# Altium PCB WIFIOTG.PcbDoc
Units mm, origin at the board's own origin, x right, y up, seen from the top; angles counter-clockwise.
Board outline 18.86 x 30.91 mm, 2 copper layers (Top Layer, Bottom Layer); 12 components, 8 nets, 74 pads, 11 vias.
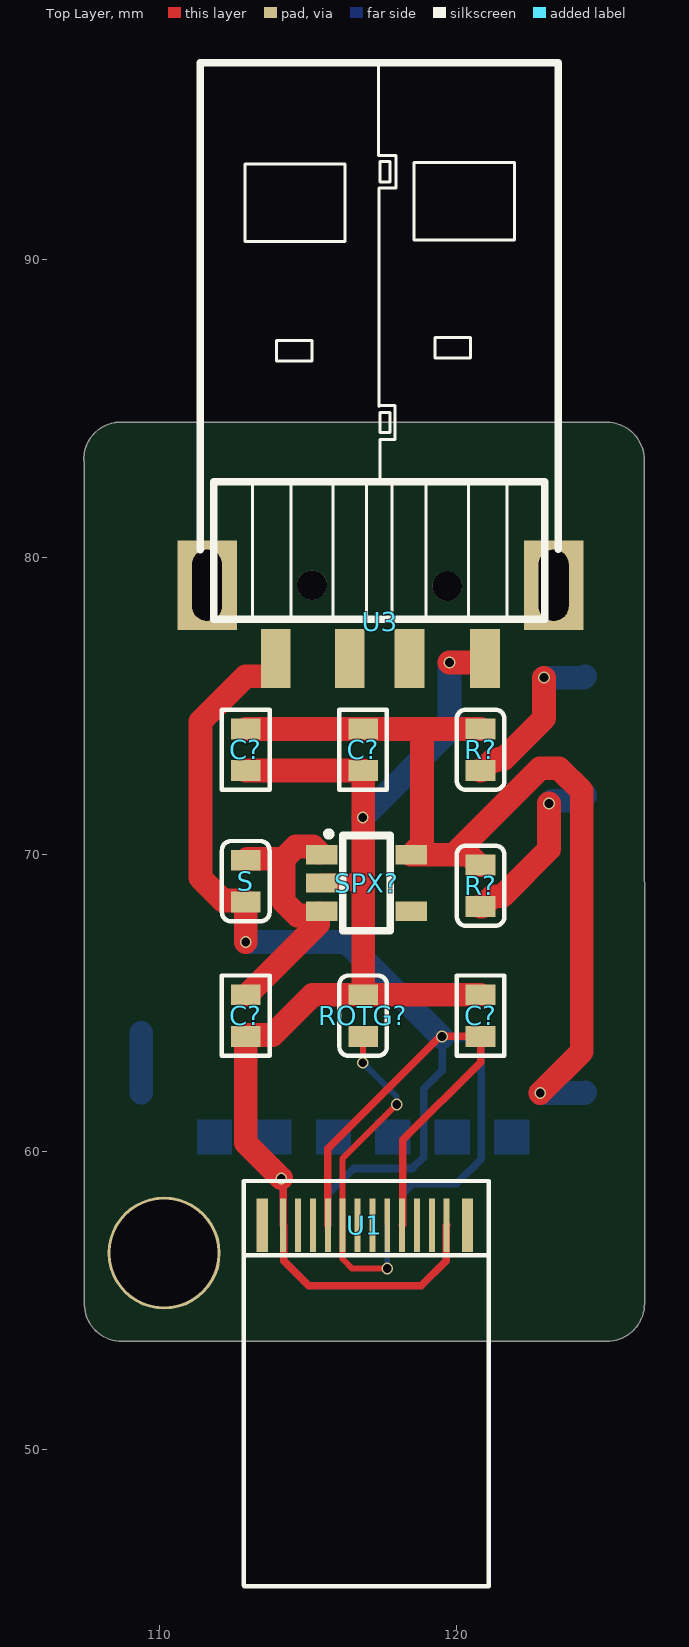
[diagram p0: Top Layer view]
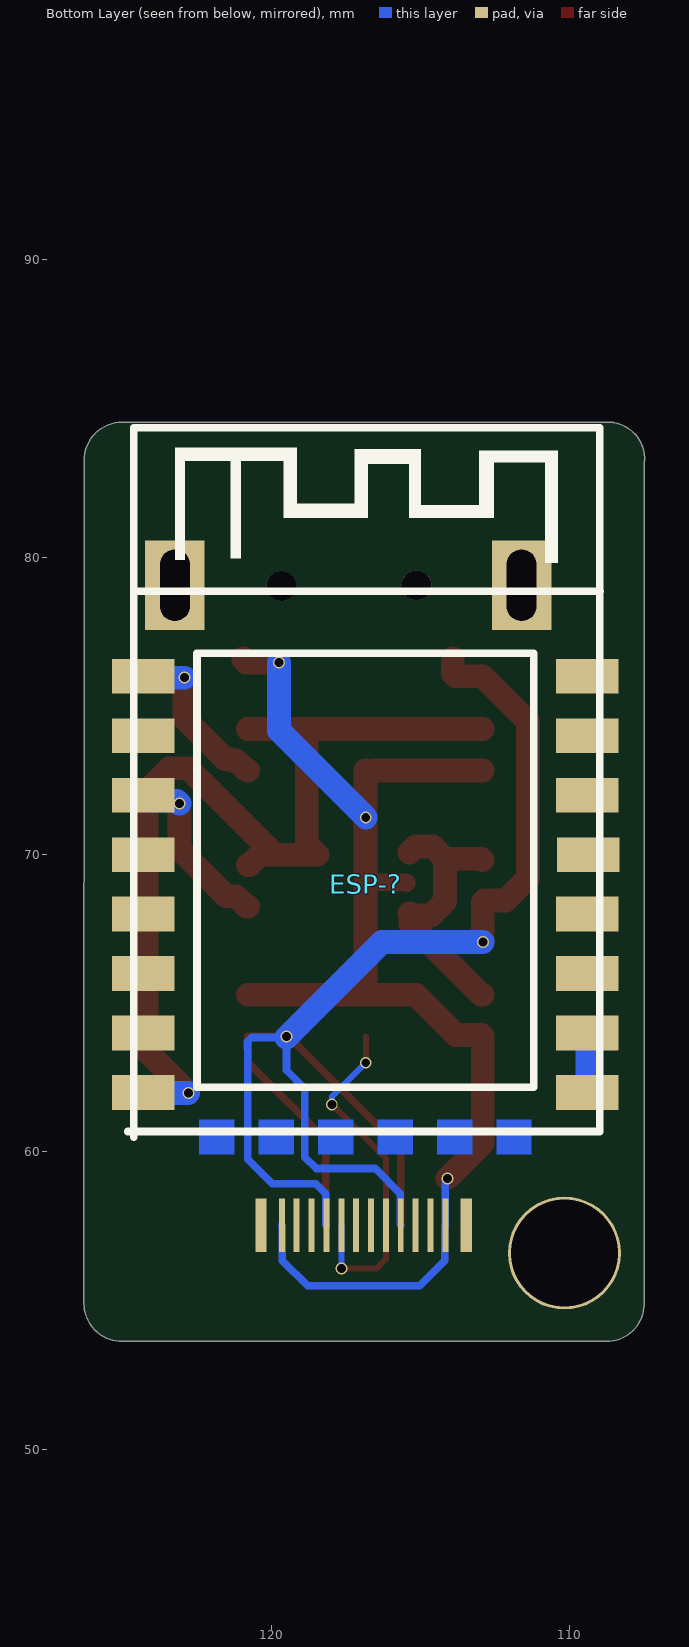
[diagram p1: Bottom Layer view, seen from below]
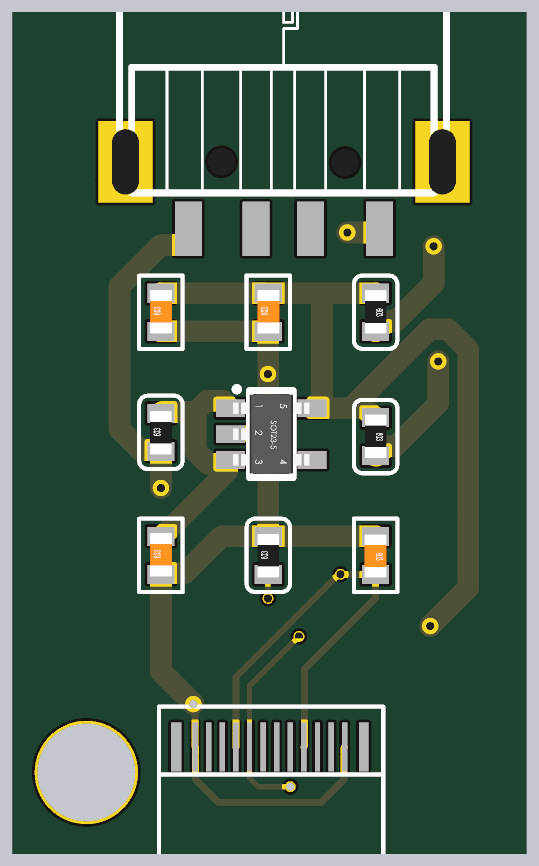
[diagram p2: 3D render of the assembled board from above, using the file's embedded part models]

## Layer stack, top to bottom
Top Solder: solder mask 0.0102, Solder Resist, Dk 3.5
Top Layer: signal copper 0.0356
Dielectric 1: dielectric 0.32, FR-4, Dk 4.8
Bottom Layer: signal copper 0.0356
Bottom Solder: solder mask 0.0102, Solder Resist, Dk 3.5

## Board outline
107.468,83.225 cw(c107.537,83.255) 107.462,83.251 cw(c108.679,83.313) 107.468,83.45 107.468,83.464 cw(c107.544,83.464) 107.474,83.493 cw(c108.679,83.313) 108.492,84.517 cw(c108.534,84.455) 108.534,84.53 108.619,84.53 cw(c108.679,83.313) 108.739,84.53 125.16,84.53 cw(c125.16,84.455) 125.167,84.53 cw(c125.038,83.261) 126.313,83.262 cw(c126.238,83.261) 126.313,83.261 126.32,54.896 cw(c126.244,54.896) 126.32,54.896 cw(c125.044,54.896) 125.044,53.62 108.737,53.62 cw(c108.737,54.883) 107.475,54.853 cw(c107.544,54.883) 107.468,54.883

## Design rules (kind name [scope] priority, off if disabled: settings)
Clearance [All] p1: gap=0.254 ignorepadtopadclearanceinfootprint=FALSE except(0: Arc-Hole Track-Hole SMDPad-Hole THPad-Hole Via-Hole Fill-Hole Poly-Hole Region-Hole Text-Hole)
PolygonConnect [All] p1: connectstyle=Relief reliefconductorwidth=0.254 reliefentries=4 polygonreliefangle="90 Angle" airgapwidth=0.254
RoutingVias [All] p1: holewidth=0.711 width=1.27 viastyle="Through Hole" minholewidth=0.711 minwidth=1.27 maxholewidth=0.711 maxwidth=1.27
SolderMaskExpansion [All] p1: expansion=0.102 istentingtop=FALSE
Width [All] p1: maxlimit=1.5 minlimit=0.2 preferedwidth=0.8 minimp=50.000000 maximp=50.000000 favimp=50.000000
30 further rules are at their usual default settings.

## Classes and differential pairs
component class WIFIotg: C? ESP-? R? ROTG? S SPX? U1 U3

## Components (designator, comment, footprint, x,y, rotation, side; value= is the part's Value field where it differs from the comment)
C? "10uF" "0603 电容" 112.928,73.53 r90 top
C? "100nF" "0603 电容" 112.928,64.589 r90 top
C? "10uF" "0603 电容" 120.777,64.567 r270 top
C? "100nF" "0603 电容" 116.878,73.53 r90 top
ESP-? "ESP-12F" ESP-12F 116.84,72.263 r180 bottom locked
R? "10K" "0603 电阻" 120.803,73.533 r270 top
R? "10K" "0603 电阻" 120.803,68.961 r270 top
ROTG? "5.1K" "0603 电阻" 116.853,64.564 r90 top
S "1.5A/32V" "0603 电阻" 112.903,69.088 r90 top
SPX? "SPX3819L" SPX3819 116.967,69.215 r0 top
U1 "TYPE_C_24P公头" TYPE_C_24PIN公头 116.84,57.837 r90 top
U3 "USB-A" USB-A公头 116.84,88.011 r90 top

## Footprints (in the part's own frame and the unit in brackets; to place one, negate y for a bottom-side part, rotate by r counter-clockwise, add the part's x,y. Pads: shape width x height; smd on the part's side, far side on the other; paste and mask are expansions set on the pad)
"0603 电容" [mm]
  rect 0.7x1 smd: 1(-0.711,0.025) 2(0.689,0.025)
  silkscreen extent -1.36,-0.77 1.34,0.83, body extent -0.79,-0.38 0.81,0.42, height 0.3
"0603 电阻" [mm]
  rect 0.7x1 smd: 1(-0.686,0) 2(0.714,0)
  silkscreen extent -1.34,-0.8 1.36,0.8, body extent -0.8,-0.4 0.8,0.4, height 0.3
ESP-12F [mil]
  rect 82.68x46.06 smd: 1(-294.5,146.81) 2(-294.5,68.07) 3(-294.5,-10.67) 4(-294.5,-89.41) 5(-294.5,-168.15) 6(-294.5,-246.89) 7(-294.5,-325.63) 8(-294.5,-404.37) 15(293.5,-404.37) 16(293.5,-325.63) 17(293.5,-246.89) 18(293.5,-168.15) 19(294.5,-89.41) 20(293.5,-10.67) 21(293.5,68.07) 22(293.5,146.81)
  Top Layer region: -220.34,-486.26 -220.34,-440.59 -174.28,-440.59 -174.28,-486.26
  Top Layer region: -141.6,-486.26 -141.6,-440.59 -95.54,-440.59 -95.54,-486.26
  Top Layer region: -62.86,-486.26 -62.86,-440.59 -16.8,-440.59 -16.8,-486.26
  Top Layer region: 15.88,-486.26 15.88,-440.59 61.94,-440.59 61.94,-486.26
  Top Layer region: 94.62,-486.26 94.62,-440.59 140.68,-440.59 140.68,-486.26
  Top Layer region: 173.36,-486.26 173.36,-440.59 219.42,-440.59 219.42,-486.26
  silkscreen extent -315,-463 311,476, body extent -314,-463 316,482, height 104
SPX3819 [mil]
  rect 41.8x25.6 smd: 1(-59.1,30.39) 2(-59.1,-7.01) 3(-59.1,-44.41) 4(59,-44.41) 5(59,30.39)
  silkscreen extent -53,-70 31,60, body extent -55,-64 55,50, height 43
TYPE_C_24PIN公头 [mm]
  rect 1.8x0.38 smd: 0(-0.306,3.377)
  rect 1.8x0.38 smd far side: 0(-0.306,3.377)
  rect 1.8x0.36 smd: 0(-0.306,-3.523)
  rect 1.8x0.36 smd far side: 0(-0.306,-3.523)
  rect 1.8x0.2 smd: A1(-0.306,2.677) A2(-0.306,2.177) A3(-0.306,1.677) A4(-0.306,1.177) A5(-0.306,0.677) A6(-0.306,0.177) A7(-0.306,-0.323) A8(-0.306,-0.823) A9(-0.306,-1.323) A10(-0.306,-1.823) A11(-0.306,-2.323) A12(-0.306,-2.823)
  rect 1.8x0.2 smd far side: B1(-0.306,-2.823) B2(-0.306,-2.323) B3(-0.306,-1.823) B4(-0.306,-1.323) B5(-0.306,-0.823) B6(-0.306,-0.323) B7(-0.306,0.177) B8(-0.306,0.677) B9(-0.306,1.177) B10(-0.306,1.677) B11(-0.306,2.177) B12(-0.306,2.677)
  silkscreen extent -12.45,-4.24 1.18,4.01
USB-A公头 [mm]
  rect 2x1 smd: 1(-11.421,2.927) 2(-11.421,0.438) 3(-11.421,-1.569) 4(-11.421,-4.109)
  rect 3x2 hole 1 slot 2.4 at 0 deg: 5(-8.958,5.239) 6(-8.958,-6.42)
  round 1 hole 1 unplated: ""(-8.982,-2.838) ""(-8.957,1.708)
  silkscreen extent -10.1,-6.57 8.65,5.47

## Part data
C? C? C? C?: library part "电容 无极"
R? R? ROTG? S: library part 电阻
SPX?: library part SPX3819LM

## Free pads (board coordinates)
  round 3.8 hole 3.6: 2(110.16,56.591)

## Via types
v1: diameter 0.4, hole 0.3, Top Layer to Bottom Layer, 11 vias

## Nets (pads, with @x,y where several pads share a name; then routed paths per layer and width w, separated by ;. In a path a pad name is that pad's centre, name@x,y a point inside that pad or via, vN(x,y) a via of type N, cw(c..) or ccw(c..) an arc to the next point about the centre after c; other vN are vias at no path point)
3V3: C?.2@112.903,74.219 C?.2@116.853,74.219 ESP-?.8 R?.1 SPX?.5 | length 32.8
  Top Layer w0.8: C?.2@112.903,74.219 116.853,74.219 118.828,74.219 ; SPX?.5 SPX?.5@118.522,69.987 ; R?.1@120.803,69.647 120.753,69.647 120.412,69.987 119.888,69.987 ; R?.1@120.803,74.219 118.828,74.219 ; v1(122.809,61.976) 124.206,63.373 124.206,72.136 123.444,72.898 122.799,72.898 119.888,69.987 ; SPX?.5@118.522,69.987 119.888,69.987 ; SPX?.5@118.522,69.987 118.596,70.062 118.596,70.118 118.828,70.349 118.828,74.219
  Bottom Layer w0.8: v1(122.809,61.976) 124.304,61.976 ESP-?.8
+VUSB: C?.2@120.802,63.878 S.1 U1.A4 U1.A9 U1.B4 U1.B9 U3.1 | length 55.4
  Top Layer w0.254: U1.A4 115.663,60.097 119.447,63.881 v1(119.507,63.881) 119.509,63.879 120.801,63.879 120.802,63.878 120.802,63.017 118.182,60.397 118.182,57.55 U1.A9
  Top Layer w0.8: v1(112.903,67.056) S.1 112.853,68.452 112.142,68.452 111.379,69.215 111.379,74.47 112.899,75.99 113.813,75.99 113.913,76.09 U3.1
  Bottom Layer w0.254: U1.B9 115.682,57.55 115.682,58.589 116.529,59.436 118.5,59.436 118.886,59.822 118.886,62.117 119.507,62.738 119.507,63.842 120.671,63.842 120.819,63.693 120.819,63.483 120.818,63.481 120.818,59.754 119.992,58.928 118.521,58.928 118.182,58.589 118.182,57.55 U1.B4
  Bottom Layer w0.8: v1(112.903,67.056) 116.293,67.056 v1@119.507,63.842
GND: C?.1 ROTG?.2 SPX?.2 U1.A1 U1.A12 U1.B1 U1.B12 U3.4 | length 54.1
  Top Layer w0.254: 114.163,58.846 U1.A1 114.182,57.512 114.182,56.332 115.028,55.487 118.798,55.487 119.644,56.333 119.644,57.512 U1.A12
  Top Layer w0.6: SPX?.2 115.491,69.062 116.814,69.062 116.853,69.101
  Top Layer w0.8: C?.1@112.903,72.819 C?.1@116.573,72.819 ; v1(114.097,59.106) 112.903,60.3 112.903,63.878 112.953,63.928 113.803,63.928 115.153,65.278 ROTG?.2 ; C?.1@116.853,72.819 116.853,71.247 116.853,69.101 ROTG?.2 ; v1(119.761,76.454) 120.849,76.454 120.949,76.554 U3.4 ; C?.1@120.802,65.278 ROTG?.2
  Bottom Layer w0.254: v1(114.097,59.106) 114.163,59.04 U1.B12 114.182,57.512 114.182,56.333 115.028,55.487 118.798,55.487 119.644,56.333 119.644,57.512 U1.B1
  Bottom Layer w0.8: v1(116.84,71.247) 119.761,74.168 v1(119.761,76.454)
NetC?_2: C?.2@112.903,65.278 S.2 SPX?.1 SPX?.3 | length 9.3
  Top Layer w0.8: C?.2@112.903,65.278 112.953,65.278 115.335,67.66 SPX?.3@115.335,67.973 ; S.2 112.953,69.852 114.175,69.852 ; SPX?.1@115.367,70.062 115.166,70.263 114.586,70.263 114.175,69.852 ; SPX?.3@115.374,68.012 SPX?.3@115.335,67.973 ; 114.175,69.852 114.175,68.414 114.644,67.945 115.307,67.945 SPX?.3@115.335,67.973
NetESP-?_1: ESP-?.1 R?.2@120.803,72.819 | length 5.6
  Top Layer w0.8: R?.2@120.803,72.819 120.853,72.869 120.903,72.869 121.199,73.165 121.371,73.165 121.421,73.215 121.574,73.215 122.936,74.577 v1(122.936,75.946)
  Bottom Layer w0.8: v1(122.936,75.946) 124.274,75.946 ESP-?.1
NetESP-?_3: ESP-?.3 R?.2@120.803,68.247 | length 6
  Top Layer w0.8: R?.2@120.803,68.247 120.853,68.247 121.199,68.593 121.524,68.593 123.105,70.174 v1(123.105,71.713)
  Bottom Layer w0.8: v1(123.105,71.713) 123.199,71.807 124.135,71.807 ESP-?.3
NetESP-?_15: ESP-?.15 ESP-?.16 | length 2
  Bottom Layer w0.8: ESP-?.15 ESP-?.16
NetROTG?_1: ROTG?.1 U1.A5 U1.B5 | length 11.8
  Top Layer w0.2: v1(116.84,62.992) 116.84,63.865 ROTG?.1 ; v1(117.663,56.068) 116.485,56.068 116.163,56.39 U1.A5 116.163,59.775 v1(117.983,61.595)
  Bottom Layer w0.2: v1(116.84,62.992) 117.983,61.849 v1(117.983,61.595) ; v1(117.663,56.068) U1.B5
pads on no net: ESP-?.2 ESP-?.4 ESP-?.5 ESP-?.6 ESP-?.7 ESP-?.17 ESP-?.18 ESP-?.19 ESP-?.20 ESP-?.21 ESP-?.22 SPX?.4 U1.0 U1.A2 U1.A3 U1.A6 U1.A7 U1.A8 U1.A10 U1.A11 U1.B2 U1.B3 U1.B6 U1.B7 U1.B8 U1.B10 U1.B11 U3. U3.2 U3.3 U3.5 U3.6

## Silkscreen, mask and mechanical layers (free items; w line width, h text height)
Mechanical 1:
  lines w0.15: 107.537,83.255 cw(c108.679,83.313) 108.737,84.455 ; 107.544,54.883 107.544,83.464 ; 107.55,54.883 ccw(c108.737,54.883) 108.737,53.696 125.044,53.696 ccw(c125.044,54.896) 126.244,54.896 126.238,83.261 ccw(c125.038,83.261) 125.16,84.455 108.534,84.455